# Altium PCB PCB1.PcbDoc
Units mil, origin at the board's own origin, x right, y up, seen from the top; angles counter-clockwise.
Board outline 5000 x 4000 mil, 2 copper layers (Top Layer, Bottom Layer); 30 components, 31 nets, 247 pads, 14 vias.
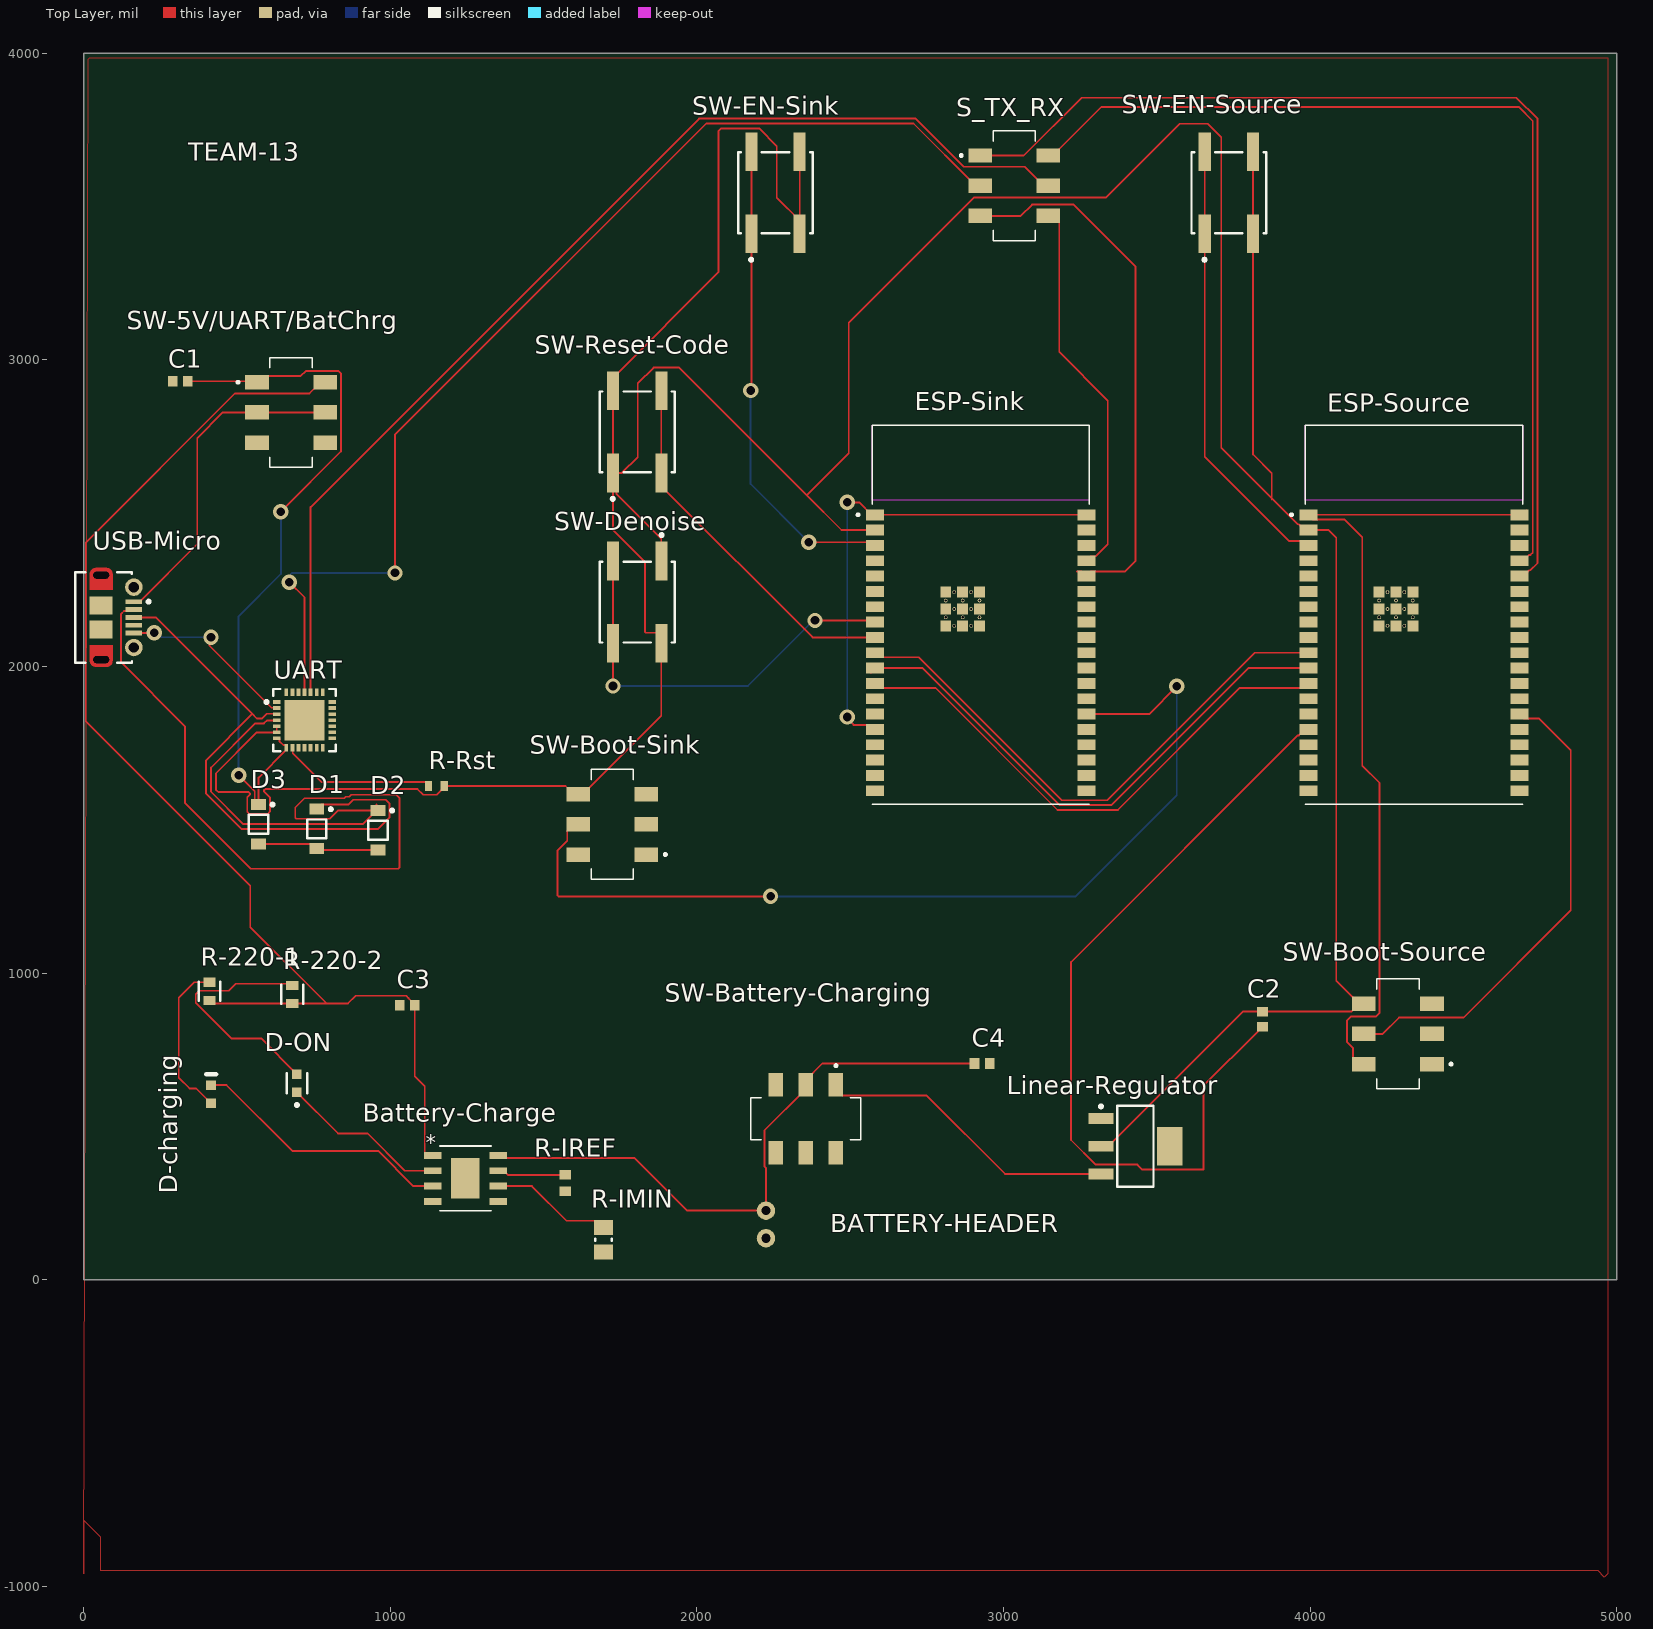
[diagram p0: Top Layer view]
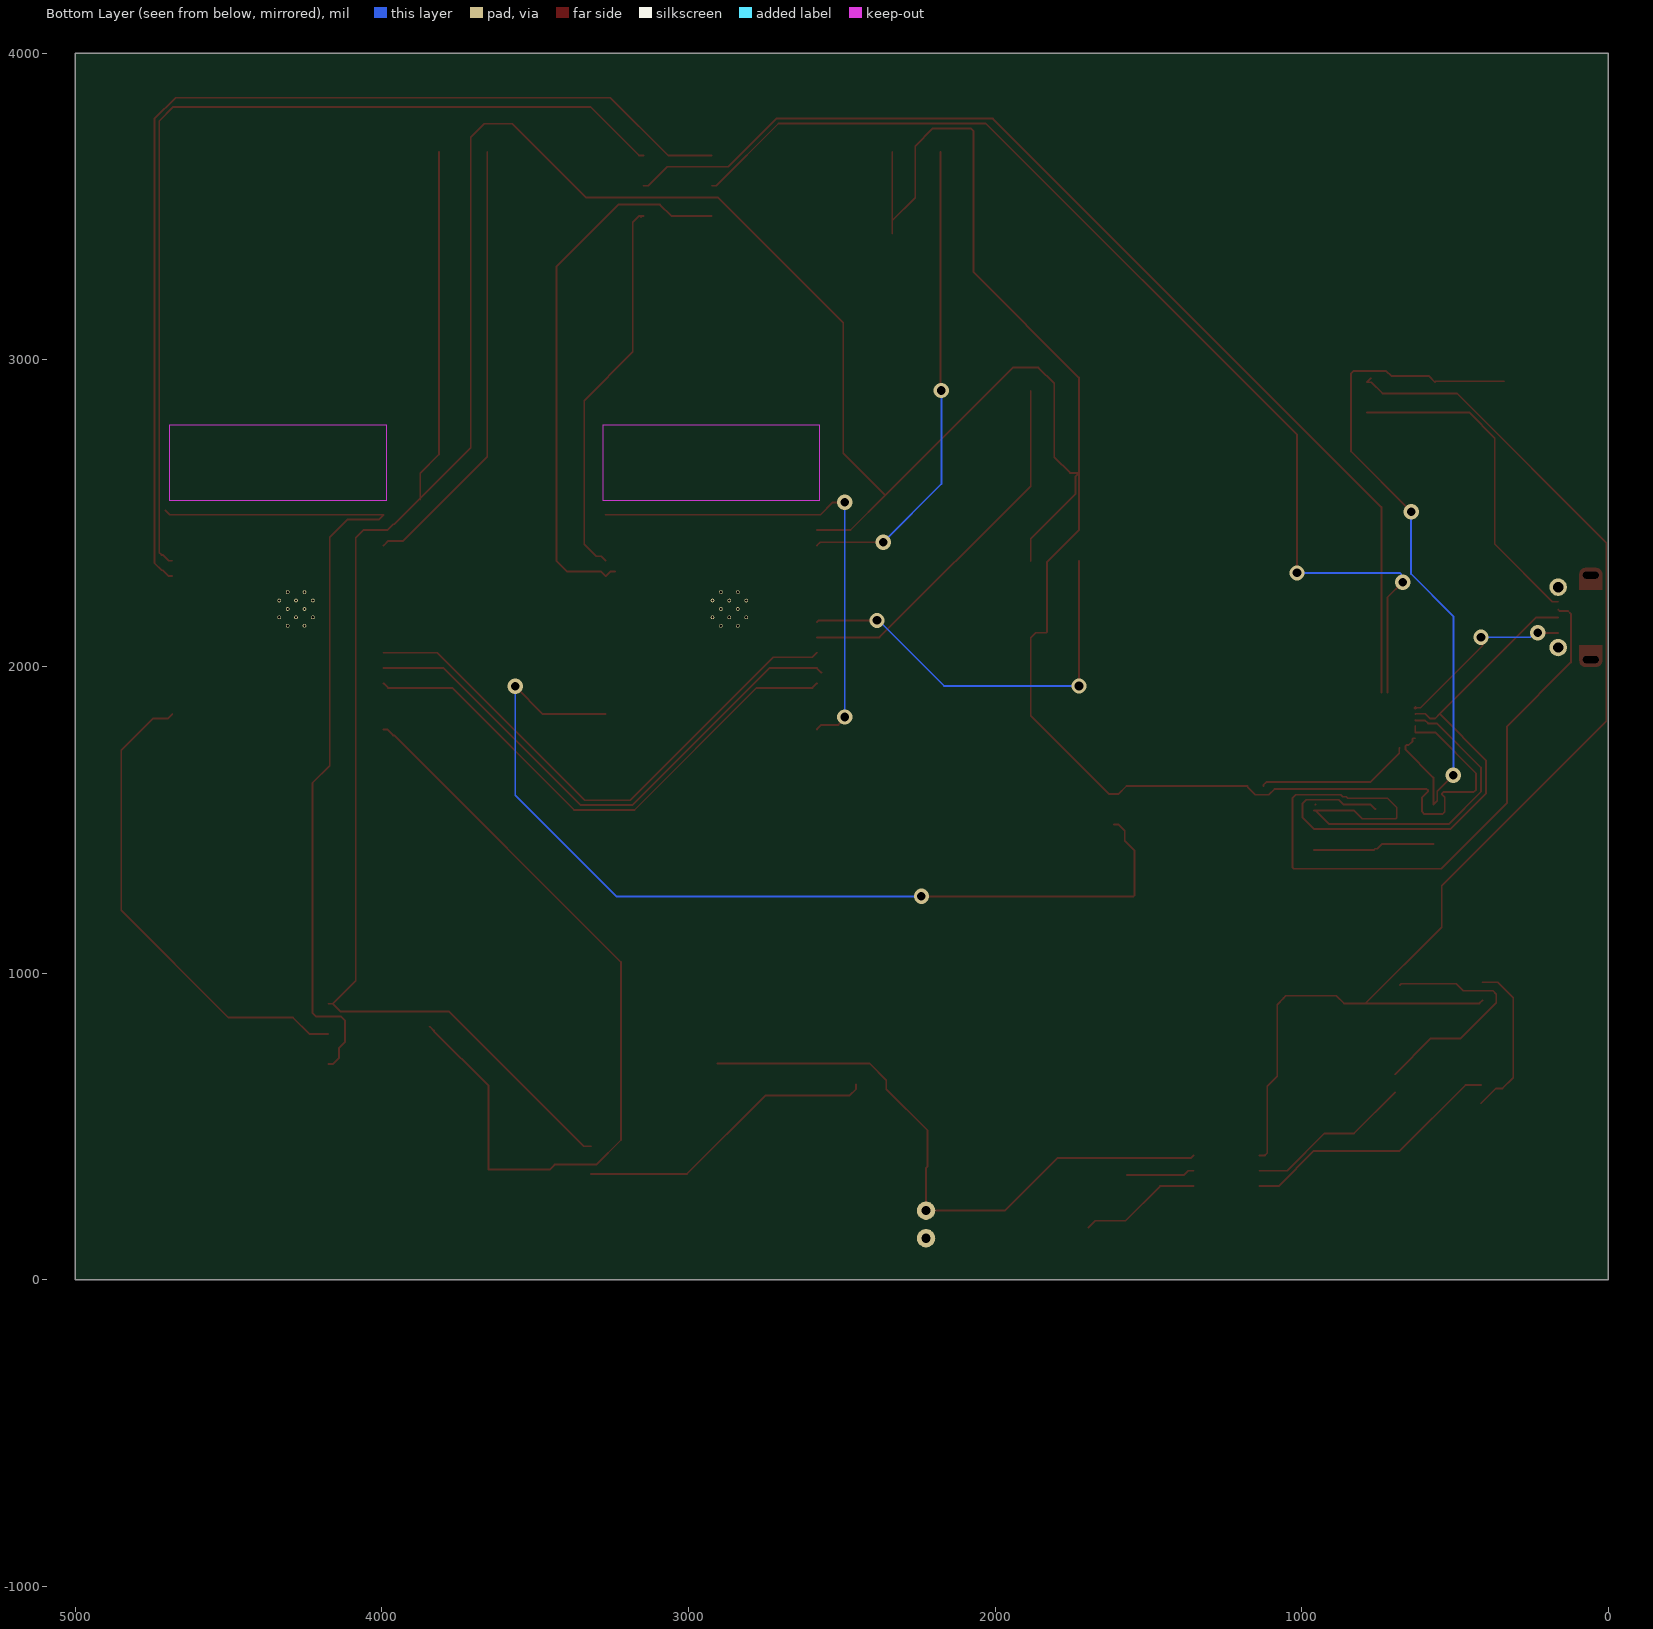
[diagram p1: Bottom Layer view, seen from below]

## Layer stack, top to bottom
Top Solder: solder mask 0.4, Solder Resist, Dk 3.5
Top Layer: signal copper 1.4
Dielectric 1: dielectric 12.6, FR-4, Dk 4.8
Bottom Layer: signal copper 1.4
Bottom Solder: solder mask 0.4, Solder Resist, Dk 3.5

## Board outline
0,0 5000,0 5000,4000 0,4000

## Design rules (kind name [scope] priority, off if disabled: settings)
Clearance [All] p1: gap=10 ignorepadtopadclearanceinfootprint=FALSE
PolygonConnect [All] p1: connectstyle=Relief reliefconductorwidth=10 reliefentries=4 polygonreliefangle="90 Angle" airgapwidth=10
RoutingVias [All] p1: holewidth=28 width=50 viastyle="Through Hole" minholewidth=28 minwidth=50 maxholewidth=28 maxwidth=50
SolderMaskExpansion [All] p1: expansion=4 istentingtop=FALSE
SupplyNets "Schematic Supply Nets" [InNet('GND')] p1: voltage=0.000
Width [All] p1: maxlimit=6 minlimit=6 preferedwidth=6
30 further rules are at their usual default settings.

## Components (designator, comment, footprint, x,y, rotation, side; value= is the part's Value field where it differs from the comment)
Battery-Charge "TPB4056A20-ES1R" ESOP-8_TPK 1245,330 r0 top
BATTERY-HEADER "PHR-2" FP-PHR-2-MFG 2290,175 r0 top
C1 "C0603C105K3RACTU" CAPC1608X87X35LL15T15 315,2930 r0 top value=1uF
C2 "C0603C105K3RACTU" CAPC1608X87X35LL15T15 3845,849.61 r90 top value=1uF
C3 "C0603C105K3RACTU" CAPC1608X87X35LL15T15 1055,895 r0 top value=1uF
C4 "C0603C105K3RACTU" CAPC1608X87X35LL15T15 2930,705 r180 top value=1uF
D1 "MMSZ4691T1G" ONSC-SOD-123-2-425-04_V 760,1470 r270 top
D2 "MMSZ4691T1G" ONSC-SOD-123-2-425-04_V 960,1465.63 r270 top
D3 "MMSZ4691T1G" ONSC-SOD-123-2-425-04_V 570,1485 r270 top
D-charging "LTST-C190AKT" LTST-C190AKT-2_V 415,605 r90 top
D-ON "LTST-C190GKT" FP-LTST-C190GKT-MFG 695,640.47 r90 top
ESP-Sink "ESP32-WROVER-E-N8R8" XCVR_ESP32-WROVER-E-N8R8 2925.51,2169.33 r0 top
ESP-Source "ESP32-WROVER-E-N8R8" XCVR_ESP32-WROVER-E-N8R8 4338.94,2169.33 r0 top
Linear-Regulator "LD1117S33TR" SOT-223_L 3430,435 r0 top
R-220-1 "CRCW0603220RFKEA" FP-CRCW0603-e3-MFG 410,940.47 r90 top
R-220-2 "CRCW0603220RFKEA" FP-CRCW0603-e3-MFG 680,930.47 r90 top
R-IMIN "CRCW0805100KJNEA" RESC2013X50X30ML20T20 1695,130 r270 top value=100kR
R-IREF "ERJ-3EKF1301V" RESC1608X55X30NL15T15 1570,315 r270 top value=1.3kR
R-Rst "RC0603FR-074K7L" RESC1608X55X25LL10T15 1150,1610 r0 top
S_TX_RX "SLW-913535-2A-SMT" SW_SLW-913535-2A-SMT 3035,3568.09 r270 top
SW-5V/UART/BatChrg "SLW-913535-2A-SMT" SW_SLW-913535-2A-SMT 676.22,2828.43 r270 top
SW-Battery-Charging "SLW-913535-2A-SMT" SW_SLW-913535-2A-SMT 2355,525 r180 top
SW-Boot-Sink "SLW-913535-2A-SMT" SW_SLW-913535-2A-SMT 1723.78,1485 r90 top
SW-Boot-Source "SLW-913535-2A-SMT" SW_SLW-913535-2A-SMT 4286.22,801.57 r90 top
SW-Denoise "EVQ-Q2F03W" FP-EVQ-Q2F03W-MFG 1805,2210 r270 top
SW-EN-Sink "EVQ-Q2F03W" FP-EVQ-Q2F03W-MFG 2256.26,3545 r90 top
SW-EN-Source "EVQ-Q2F03W" FP-EVQ-Q2F03W-MFG 3735,3545 r90 top
SW-Reset-Code "EVQ-Q2F03W" FP-EVQ-Q2F03W-MFG 1805,2765 r90 top
UART "CP2103-GMR" FP-CP2103-GMR-MFG 720,1825 r0 top
USB-Micro "105017-0001" USB-MICRO-B_V 110,2160 r270 top

## Footprints (in the part's own frame and the unit in brackets; to place one, negate y for a bottom-side part, rotate by r counter-clockwise, add the part's x,y. Pads: shape width x height; smd on the part's side, far side on the other; paste and mask are expansions set on the pad)
CAPC1608X87X35LL15T15 [mm] "Chip Capacitor, 2-Leads, Body 1.60x0.80mm, IPC High Density"
  rect 0.8x0.9 smd: 1(-0.625,0) 2(0.625,0)
  body extent -0.87,-0.48 0.87,0.48, height 0.87
ESOP-8_TPK [mil]
  rect 57.5x22 smd paste+0 mask+0: 1(-107.25,75) 2(-107.25,25) 3(-107.25,-25) 4(-107.25,-75) 5(107.25,-75) 6(107.25,-25) 7(107.25,25) 8(107.25,75)
  rect 93x132 smd paste-65.5 mask+0: 9(0,0)
  silkscreen extent -84,-106 84,106, body extent -122,-101 122,101, height 67
FP-CP2103-GMR-MFG [mm]
  rect 0.6x0.3 smd paste+0 mask+0: 1(-2.3,1.5) 2(-2.3,1) 3(-2.3,0.5) 4(-2.3,0) 5(-2.3,-0.5) 6(-2.3,-1) 7(-2.3,-1.5) 15(2.3,-1.5) 16(2.3,-1) 17(2.3,-0.5) 18(2.3,0) 19(2.3,0.5) 20(2.3,1) 21(2.3,1.5)
  rect 0.3x0.6 smd paste+0 mask+0: 8(-1.5,-2.3) 9(-1,-2.3) 10(-0.5,-2.3) 11(0,-2.3) 12(0.5,-2.3) 13(1,-2.3) 14(1.5,-2.3) 22(1.5,2.3) 23(1,2.3) 24(0.5,2.3) 25(0,2.3) 26(-0.5,2.3) 27(-1,2.3) 28(-1.5,2.3)
  rect 3.35x3.35 smd paste-1000 mask+0: 29(0,0)
  silkscreen extent -3.27,-2.58 2.58,2.58, body extent -2.7,-2.7 2.7,2.7, height 0.25
FP-CRCW0603-e3-MFG [mm]
  rect 0.75x1 smd paste+0 mask+0: 1(-0.75,0) 2(0.75,0)
  silkscreen extent -0.8,-0.9 0.8,0.9, body extent -1.22,-0.6 1.22,0.6, height 0.25
FP-EVQ-Q2F03W-MFG [mm]
  rect 3.2x1 smd paste+0 mask+0: A(-3.4,2) A'(3.4,2) B(-3.4,-2) B'(3.4,-2)
  silkscreen extent -5.67,-3.1 3.35,3.1, body extent -5.1,-3.2 5.1,3.2, height 0.25
FP-LTST-C190GKT-MFG [mm]
  rect 0.8x0.8 smd paste+0 mask+0: 1(-0.75,0) 2(0.75,0)
  silkscreen extent -1.92,-0.85 0.85,0.85, body extent -1.25,-0.55 1.25,0.55, height 0.25
FP-PHR-2-MFG [mil]
  round 60 hole 30: 1(-65,50) 2(-65,-40)
  body extent -118,-93 118,93, height 10
LTST-C190AKT-2_V [mm] "SMD, 2-Leads, Body 1.6x0.8mm"
  rect 0.8x0.8 smd: 1(-0.75,0) 2(0.75,0)
  silkscreen extent 1.65,-0.4 1.65,0.4, body extent -0.8,-0.4 0.8,0.4, height 0.8
ONSC-SOD-123-2-425-04_V [mm] "SOD, 2-Leads, Body 2.69x1.6mm"
  rect 0.91x1.22 smd: 1(-1.635,0) 2(1.635,0)
  silkscreen extent -1.76,-0.8 0.78,1.29, body extent -1.35,-0.8 1.35,0.8, height 1.35
RESC1608X55X25LL10T15 [mm] "Chip Resistor, 2-Leads, Body 1.60x0.80mm, IPC High Density"
  rect 0.6x0.8 smd: 1(-0.65,0) 2(0.65,0)
  body extent -0.85,-0.45 0.85,0.45, height 0.55
RESC1608X55X30NL15T15 [mm] "Chip Resistor, 2-Leads, Body 1.60x0.80mm, IPC Medium Density"
  rect 0.8x0.95 smd: 1(-0.675,0) 2(0.675,0)
  body extent -0.87,-0.48 0.87,0.48, height 0.55
RESC2013X50X30ML20T20 [mm] "Chip Resistor, 2-Leads, Body 2.00x1.25mm, IPC Low Density"
  rect 1.25x1.55 smd: 1(-1.025,0) 2(1.025,0)
  silkscreen extent -0.1,-0.67 0.1,0.67, body extent -1.1,-0.72 1.1,0.72, height 0.5
SOT-223_L [mm] "SOT223, 4-Leads, Body 6.5x3.5mm, Pitch 2.3mm, Lead Span 7mm, IPC High Density"
  rect 2.1x0.9 smd: 1(-2.85,2.3) 2(-2.85,0) 3(-2.85,-2.3)
  rect 2.1x3.2 smd: 4(2.85,0)
  silkscreen extent -2.97,-3.35 1.5,3.42, body extent -1.85,-3.35 1.85,3.35, height 1.8
SW_SLW-913535-2A-SMT [mm]
  rect 1.2x1.95 smd: 1(-2.5,-2.825) 2(0,-2.825) 3(2.5,-2.825) 4(-2.5,2.825) 5(0,2.825) 6(2.5,2.825)
  silkscreen extent -4.55,-4.5 4.55,1.75
USB-MICRO-B_V [mm] "USB, MICRO B, Body 7.491x4.695 mm, Pitch 0.65 mm"
  rect 0.4x1.35 smd: 1(-1.3,1.35) 2(-0.65,1.35) 3(0,1.35) 4(0.65,1.35) 5(1.3,1.35)
  round 1.45 hole 0.85: 6(-2.5,1.35) 7(2.5,1.35)
  rrect50% 0x0 hole 0.6 slot 1.3 at 90 deg: 8(-3.5,-1.35) 11(3.5,-1.35)
  rect 1.5x1.9 smd: 9(-1,-1.35) 10(1,-1.35)
  Top Layer circle w0.5: c3.6,-0.9 r0.25
  Top Layer circle w0.5: c3.6,-1.8 r0.25
  Top Layer circle w0.5: c-3.6,-0.9 r0.25
  Top Layer circle w0.5: c-3.6,-1.8 r0.25
  Top Layer region: -2.3,-2.3 -2.3,-0.4 -3.6,-0.4 -3.6,-2.3
  Top Layer region: 2.3,-0.4 2.3,-2.3 3.6,-2.3 3.6,-0.4
  Top Layer region: 3.6,-0.9 3.6,-1.8 4.1,-1.8 4.1,-0.9
  Top Layer region: -3.6,-1.8 -3.6,-0.9 -4.1,-0.9 -4.1,-1.8
  silkscreen extent -3.75,-3.5 3.75,2.7, body extent -4.1,-3.9 4.1,1.5, height 2.67
XCVR_ESP32-WROVER-E-N8R8 [mm]
  rect 1.5x0.9 smd: 1(-8.75,8.26) 2(-8.75,6.99) 3(-8.75,5.72) 4(-8.75,4.45) 5(-8.75,3.18) 6(-8.75,1.91) 7(-8.75,0.64) 8(-8.75,-0.63) 9(-8.75,-1.9) 10(-8.75,-3.17) 11(-8.75,-4.44) 12(-8.75,-5.71) 13(-8.75,-6.98) 14(-8.75,-8.25) 15(-8.75,-9.52) 16(-8.75,-10.79) 17(-8.75,-12.06) 18(-8.75,-13.33) 19(-8.75,-14.6) 20(8.75,-14.6) 21(8.75,-13.33) 22(8.75,-12.06) 23(8.75,-10.79) 24(8.75,-9.52) 25(8.75,-8.25) 26(8.75,-6.98) 27(8.75,-5.71) 28(8.75,-4.44) 29(8.75,-3.17) 30(8.75,-1.9) 31(8.75,-0.63) 32(8.75,0.64) 33(8.75,1.91) 34(8.75,3.18) 35(8.75,4.45) 36(8.75,5.72) 37(8.75,6.99) 38(8.75,8.26)
  rect 0.9x0.9 smd: 39_1(-2.9,1.86) 39_2(-1.5,1.86) 39_3(-0.1,1.86) 39_4(-2.9,0.46) 39_5(-1.5,0.46) 39_6(-0.1,0.46) 39_7(-2.9,-0.94) 39_8(-1.5,-0.94) 39_9(-0.1,-0.94)
  round 0.3 hole 0.2 mask+0: 40(-2.2,1.86) 41(-0.8,1.86) 42(-2.9,1.16) 43(-1.5,1.16) 44(-0.1,1.16) 45(-2.2,0.46) 46(-0.8,0.46) 47(-2.9,-0.24) 48(-1.5,-0.24) 49(-0.1,-0.24) 50(-2.2,-0.94) 51(-0.8,-0.94)
  Keep-Out Layer region: 9,9.48 -9,9.48 -9,15.7 9,15.7
  silkscreen extent -10.26,-15.7 9,15.7, body extent -9,-15.7 9,15.7, height 3.45

## Part data
Battery-Charge: "No Description Available", Mfr_Name=3Peak, Supplier Part Number 1=5503-TPB4056A20-ES1RCT-ND, RefDes=RefDes, Supplier 1=Digikey, Type=Type
BATTERY-HEADER: library part CMP-002-00071-2, "PH Series 2 Position 2 mm Pitch Free Hanging Housing Connector", Case/Package=None, Availability=Unavailable, Component Type=Standard, Design Item ID=PHR-2, MP=PHR-2, Pins=2, Price=None, Source=PHR-2.SchLib
C1 C2 C3 C4: library part CMP-2006-03713-1, Capacitor Type=Ceramic, Case/Package=0603, Manufacturer=Kemet, Max Operating Temperature=125°C, Min Operating Temperature=-55°C, Package Shape=Rectangular, Package Style=SMTMeter, Rated DC Voltage (URdc)=25V, Supplier Part Number=80-C0603C105K3R, Temperature Characteristics Code=X7R, Tolerance  (fill in as +-)=10%, Category="Ceramic Capacitors", ComponentLink1Description=https://datasheet.ciiva.com:443/pdfs/VipMasterIC/IC/KEME/KEME-S-A0008991654/KEME-S-A0008991654-1.pdf?src-supplier=IHS+Markit, ComponentLink1URL=https://datasheet.ciiva.com:443/pdfs/VipMasterIC/IC/KEME/KEME-S-A0008991654/KEME-S-A0008991654-1.pdf?src-supplier=IHS+Markit, ComponentLink2Description=http://www.farnell.com/datasheets/2740425.pdf?src-supplier=Farnell, ComponentLink2URL=http://www.farnell.com/datasheets/2740425.pdf?src-supplier=Farnell, ComponentLink3Description=http://uk.rs-online.com/webdocs/1528/0900766b81528de6.pdf?src-supplier=Rs, ComponentLink3URL=http://uk.rs-online.com/webdocs/1528/0900766b81528de6.pdf?src-supplier=Rs, ComponentLink4Description=http://components.arrow.com/part/dataview/53683125S181328N7429?src-supplier=Arrow+Electronics, ComponentLink4URL=http://components.arrow.com/part/dataview/53683125S181328N7429?src-supplier=Arrow+Electronics, ComponentLink5Description=http://www.farnell.com/datasheets/2740425.pdf?src-supplier=Element14, ComponentLink5URL=http://www.farnell.com/datasheets/2740425.pdf?src-supplier=Element14, ComponentLink6Description=http://www.kemet.com/Lists/ProductCatalog/Attachments/53/KEM_C1002_X7R_SMD.pdf?src-supplier=Avnet, ComponentLink6URL=http://www.kemet.com/Lists/ProductCatalog/Attachments/53/KEM_C1002_X7R_SMD.pdf?src-supplier=Avnet, ComponentLink7Description=http://www.farnell.com/datasheets/2740425.pdf?src-supplier=Newark, ComponentLink7URL=http://www.farnell.com/datasheets/2740425.pdf?src-supplier=Newark, ComponentLink8Description=https://api.kemet.com/component-edge/download/datasheet/C0603C105K3RACTU.pdf?src-supplier=Digikey, ComponentLink8URL=https://api.kemet.com/component-edge/download/datasheet/C0603C105K3RACTU.pdf?src-supplier=Digikey, ComponentLink9Description=https://datasheet.octopart.com/C0603C105K3RACTU-KEMET-datasheet-164512540.pdf?src-supplier=TME, ComponentLink9URL=https://datasheet.octopart.com/C0603C105K3RACTU-KEMET-datasheet-164512540.pdf?src-supplier=TME, Dielectric Material=Ceramic, Height=0.8mm, JESD-609 Code=e3, Length=1.6mm, Manufacturer Part Number=C0603C105K3RACTU, Mounting Technology="Surface Mount", Multilayer=Yes, Packaging="Tape and Reel", Part Number=C0603C105K3RACTU, Pins=2, Pricing="1=0.25, 10=0.156, 50=0.156, 100=0.119, 500=0.112, 1000=0.107, 4000=0.06, 8000=0.058, 10000=0.058 (USD)", Reach SVHC Compliant=Yes, RoHS=Yes, RoHS Compliant=Yes, Stock=8675, Supplier=Mouser, Terminal Finish=Nickel, Termination=Wraparound, Tolerance (fill in as +-)=10%, Width=0.8mm
D1 D2 D3: library part CMP-1060-00606-1, "Zener Voltage Regulator, 500 mW, 2-Pin SOD-123, Pb-Free, Tape and Reel", Manufacturer="On Semiconductor", ComponentLink1Description="Manufacturer URL", ComponentLink1URL=http://www.onsemi.com/, ComponentLink2Description=Datasheet, ComponentLink2URL=http://www.onsemi.com/pub_link/Collateral/MMSZ4678T1-D.PDF, ComponentLink3Description="Package Specification", ComponentLink3URL=http://www.onsemi.com/pub_link/Collateral/425-04.PDF, DatasheetVersion="Rev. 9", Mounting Technology="Surface Mount", P Max (W)=0.5, PackageDescription="2-Pin SOD, Body 1.6 x 2.69 mm", PackageReference=SOD-123-2-425-04, PackageVersion="Rev. G, 10/2009", Packing="Tape and Reel", PartNumber=MMSZ4691T1G, RoHS=Pb-Free, VZ Typ (V)=6.2
D-charging: library part CMP-1674-00006-1, "Single Color Chip LED, 2.1 V, 2 mcd, -55 to 85 degC, 2-Pin SMD, RoHS, Tape and Reel", ComponentLink1Description="Manufacturer URL", ComponentLink1URL=http://www.us.liteon.com/, ComponentLink2Description=Datasheet, ComponentLink2URL=http://datasheet.octopart.com/LTST-C190AKT-Lite-On-datasheet-11729267.pdf, DatasheetVersion=Jan-03, PackageDescription="2-Pin Surface Mount Device, Body 1.6 x 0.8 mm", PackageReference=LTST-C190AKT-2
D-ON: library part CMP-22017-000005-2, "LED GREEN CLEAR CHIP SMD", Case Code (Imperial)=0603, Case Code (Metric)=1608, Color=Green, Forward Current=30mA, Forward Voltage=2.1V, Lens Color=Colorless, Max Operating Temperature=85°C, Min Operating Temperature=-55°C, Package Quantity=1, Power Dissipation=100mW, Reverse Voltage=5V, Test Current=10mA, Voltage=2V, Case/Package=0603, Depth=0.8mm, Dominant Wavelength=569nm, Height=0.8mm, Illumination Color=Green, Lead Free="Lead Free", Length=1.6mm, Lens Style=Clear, Lens Transparency=Clear, Luminous Intensity=6mcd, Mount="Surface Mount", Number of Elements=1, Number of LEDs=1, Number of Pins=2, Packaging="Tape and Reel", Power Rating=100mW, Radiation Hardening=No, Viewing Angle=130°, Wavelength=565nm, Width=0.8mm
ESP-Sink ESP-Source: library part CMP-005-000000-2, "Multiprotocol Modules SMD Module ESP32-WROVER-E, ESP32-D0WD-V3, 3.3V 64Mbit PSRAM, 8 MB SPI flash, PCB Antenna", Package=None, Availability=Unavailable, Component Type=Standard, Design Item ID=ESP32-WROVER-E-N8R8, MP=ESP32-WROVER-E-N8R8, Pin Count=47, Price=None, Source=ESP32-WROVER-E-N8R8.SchLib
Linear-Regulator: library part CMP-0244-00310-1, "Fixed Low Drop Positive Voltage Regulator, 3.3V, 4-Pin SOT-223, Tape and Reel", ComponentLink1Description="Manufacturer URL", ComponentLink1URL=http://www.st.com, ComponentLink2Description=Datasheet, ComponentLink2URL=http://www.st.com/internet/com/TECHNICAL_RESOURCES/TECHNICAL_LITERATURE/DATASHEET/CD00000544.pdf, DatasheetVersion=1/11/2011, PackageDescription="4-Pin SOT-223 Package, 6.5 x 3.5 mm Body, 2.3 mm Pitch, 7 mm Lead Span", PackageReference=SOT-223, PackageVersion=2010
R-220-1 R-220-2: library part CMP-2000-03085-2, "RES Thick Film, 220Ω, 1%, 0.1W, 100ppm/°C, 0603", Case Code (Imperial)=0603, Case Code (Metric)=1608, Max Operating Temperature=155°C, Max Power Dissipation=100mW, Min Operating Temperature=-55°C, Package Quantity=10, Resistance=220R, Temperature Coefficient=100ppm/°C, Tolerance=1%, Voltage Rating=75V, Case/Package=0603, Composition="Thick Film", Contact Plating=Tin, Depth=0.85mm, Features="Automotive AEC-Q200", Height=0.45mm, Lead Free="Lead Free", Length=1.55mm, Military Standard=Not, Number of Terminations=2, Packaging="Tape and Reel", Power Rating=100mW, Radiation Hardening=No, Termination=SMD/SMT, Voltage Rating (DC)=75V, Weight=7.1E-05oz, Width=0.033inch
R-IMIN: library part CMP-2001-04900-1, Case/Package=0805, Manufacturer="Vishay Dale", Max Operating Temperature=155°C, Min Operating Temperature=-55°C, Package Height=0.45mm, Package Length=2mm, Package Shape=Rectangular, Package Width=1.25mm, Power=125mW, Rated Temperature=70°C, Resistor Type="FIXED RESISTOR", Supplier Part Number=71-CRCW0805J-100K-E3, Temperature Coefficient (ppm/Cel)=200, Tolerance=5%, Working Voltage=150V, Category="Chip SMD Resistors", ComponentLink1Description=https://datasheet.ciiva.com:443/pdfs/VipMasterIC/IC/VISH/VISH-S-A0007266705/VISH-S-A0007266705-1.pdf?src-supplier=IHS+Markit, ComponentLink1URL=https://datasheet.ciiva.com:443/pdfs/VipMasterIC/IC/VISH/VISH-S-A0007266705/VISH-S-A0007266705-1.pdf?src-supplier=IHS+Markit, Construction=Chip, JESD-609 Code=e3, Manufacturer Part Number=CRCW0805100KJNEA, Mounting Technology="Surface Mount", Packaging="Tape and Reel", Part Number=CRCW0805100KJNEA, Pins=2, Pricing="1=0.1, 10=0.022, 50=0.022, 100=0.018, 1000=0.011, 10000=0.004 (USD)", Reach SVHC Compliant=Yes, Reference Standard=AEC-Q200, RoHS=Yes, RoHS Compliant=Yes, Stock=127338, Supplier=Mouser, Technology="METAL GLAZE/THICK FILM", Terminal Finish=Nickel, Termination=Wraparound
R-IREF: library part CMP-2000-00232-1, Case/Package=0603, Manufacturer=Panasonic, Max Operating Temperature=155°C, Min Operating Temperature=-55°C, Package Height=0.45mm, Package Length=1.6mm, Package Shape=Rectangular, Package Width=0.8mm, Power=100mW, Rated Temperature=70°C, Resistor Type="FIXED RESISTOR", Supplier Part Number=667-ERJ-3EKF1301V, Temperature Coefficient (ppm/Cel)=100, Tolerance=1%, Working Voltage=75V, Category="Chip SMD Resistors", ComponentLink1Description=https://datasheet.ciiva.com:443/pdfs/VipMasterIC/IC/PANA/PANA-S-A0009889626/PANA-S-A0009889626-1.pdf?src-supplier=IHS+Markit, ComponentLink1URL=https://datasheet.ciiva.com:443/pdfs/VipMasterIC/IC/PANA/PANA-S-A0009889626/PANA-S-A0009889626-1.pdf?src-supplier=IHS+Markit, ComponentLink2Description=https://datasheet.ciiva.com/46374/426256-46374156.pdf?src-supplier=Element14, ComponentLink2URL=https://datasheet.ciiva.com/46374/426256-46374156.pdf?src-supplier=Element14, ComponentLink3Description=https://datasheet.ciiva.com/46387/426256-46387020.pdf?src-supplier=Element14, ComponentLink3URL=https://datasheet.ciiva.com/46387/426256-46387020.pdf?src-supplier=Element14, ComponentLink4Description=https://datasheet.ciiva.com/6137/426256-6137483.pdf?src-supplier=Farnell, ComponentLink4URL=https://datasheet.ciiva.com/6137/426256-6137483.pdf?src-supplier=Farnell, ComponentLink5Description=https://datasheet.ciiva.com/28593/1678782-28593215.pdf?src-supplier=Element14, ComponentLink5URL=https://datasheet.ciiva.com/28593/1678782-28593215.pdf?src-supplier=Element14, ComponentLink6Description=https://datasheet.ciiva.com/43460/426256-43460476.pdf?src-supplier=Farnell, ComponentLink6URL=https://datasheet.ciiva.com/43460/426256-43460476.pdf?src-supplier=Farnell, ComponentLink7Description=https://datasheet.ciiva.com/24165/aoa0000ce2-24165718.pdf?src-supplier=Mouser, ComponentLink7URL=https://datasheet.ciiva.com/24165/aoa0000ce2-24165718.pdf?src-supplier=Mouser, ComponentLink8Description=https://datasheet.ciiva.com/16788/70260748-16788053.pdf?src-supplier=Allied+Electronics, ComponentLink8URL=https://datasheet.ciiva.com/16788/70260748-16788053.pdf?src-supplier=Allied+Electronics, ComponentLink9Description=https://datasheet.ciiva.com/30261/aoa0000ce2-30261979.pdf?src-supplier=Onlinecomponents.com, ComponentLink9URL=https://datasheet.ciiva.com/30261/aoa0000ce2-30261979.pdf?src-supplier=Onlinecomponents.com, Construction=Rectangular, JESD-609 Code=e3, Manufacturer Part Number=ERJ-3EKF1301V, Mounting Technology="Surface Mount", Packaging="Tape and Reel", Part Number=ERJ-3EKF1301V, Pins=2, Pricing="1=0.1, 10=0.03, 50=0.03, 100=0.017, 500=0.014, 1000=0.009, 5000=0.007, 10000=0.006, 25000=0.005 (USD)", Reach SVHC Compliant=Yes, Reference Standard=AEC-Q200, RoHS=Yes, RoHS Compliant=Yes, Stock=69323, Supplier=Mouser, Technology="METAL GLAZE/THICK FILM", Terminal Finish=Nickel, Termination=Wraparound
R-Rst: library part CMP-2000-06942-1, "Chip Resistor, 4.7 KOhm, +/- 1%, 0.1 W, -55 to 155 degC, 0603 (1608 Metric), RoHS, Tape and Reel", Case Code - in=0603, Case Code - mm=1608, Manufacturer=Yageo, Operating Temperature Range=-55Cto+155C, Package Description="2-Pin Surface Mount Device, Body 1.6 x 0.8 mm", Power Rating=100mW, Resistance=4.7kOhms, Temperature Coefficient=100PPM/C, Tolerance=1%, Voltage Rating=50V, Datasheet URL=http://www.yageo.com/documents/recent/PYu-RC_Group_51_RoHS_L_7.pdf, Datasheet Version="Rev. 7, 05/2017", Manufacturer URL=http://www.yageo.com/, Mounting Technology=SurfaceMount, Package Reference=0603, Packaging=Reel, Product=ThickFilmResistorsGeneralPurpose, Series=RC, Termination Style=SMD/SMT
S_TX_RX SW-5V/UART/BatChrg SW-Battery-Charging SW-Boot-Sink SW-Boot-Source: library part CMP-007-000000-2, "Switch Slide ON ON DPDT Raised Slide 0.1A 12VDC 10000Cycles Gull Wing SMD Box", Package=None, Availability=Unavailable, Component Type=Standard, Design Item ID=SLW-913535-2A-SMT, MP=SLW-913535-2A-SMT, Pin Count=6, Price=None, Source=SLW-913535-2A-SMT.SchLib
SW-Denoise SW-EN-Sink SW-EN-Source SW-Reset-Code: library part CMP-05618-000127-1, "SWITCH TACTILE SPST-NO 0.02A 15V", Actuator Color=White, Case/Package=SMD/SMT, Contact Current Rating=20mA, Contact Resistance=100mR, Max Operating Temperature=85°C, Max Voltage Rating (AC)=250V, Max Voltage Rating (DC)=15V, Min Operating Temperature=-40°C, Operating Force=1N, Package Quantity=1, Actuator Length=1.3mm, Actuator Type=Standard, Body Depth=6mm, Color=White, Contact Plating=Gold, Current Rating=20mA, Depth=6.6mm, Electrical Life=1000000Cycles, Height=3.1mm, Illumination Type=Non-Illuminated, Lead Free="Lead Free", Length=6mm, Max Current Rating=20mA, Mechanical Life=1000000Cycles, Mount="Surface Mount", Number of Poles=1, Orientation=Straight, Packaging="Tape and Reel", Radiation Hardening=No, RoHS Compliant=Yes, Series=EVQQ2, Size=1.8mm, Switch Function=Off-Mom, Switch Travel=0.2mm, Termination=SMD/SMT, Thickness=1.8mm, Throw Configuration=SPST, Voltage Rating (AC)=250V, Voltage Rating (DC)=15V, Width=6.5mm
UART: library part CMP-08107-000005-1, "IC CTRLR BRIDGE USB-UART 28MLP", Ambient Temperature Range High=+125°C, Ambient Temperature Range Low=-55°C, Manufacturer="Silicon Labs", Max Supply Voltage=3.6V, Min Supply Voltage=1.8V, Nominal Supply Current=20mA, Package=0, Temperature="-40°C to +85°C", Temperature Range High=+85°C, Temperature Range Low=-40°C, Automotive=No, Category=IC, ComponentLink2Description=Datasheet, ComponentLink2URL=https://www.silabs.com/documents/public/data-sheets/CP2103.pdf, Device Class L1="Integrated Circuits (ICs)", Device Class L2="Interface ICs", Device Class L3=Controllers, Digikey Description="IC CTRLR BRIDGE USB-UART 28MLP", Function="Bridge, USB to UART", Height=1mm, Interface=UART,USB,RS-232,RS-485, Ipc Land Pattern Name=QFN50P500X500X90-28, Lead Free=Yes, Manufacturer Part Number=CP2103-GMR, Mouser Description="I/O Controller Interface IC USB-TO-UART BRIDGE", Octopart=https://octopart.com/cp2103-gmr-silicon+labs-519938, RoHS=TRUE, Standoff Height=0.03mm
USB-Micro: library part CMP-2000-05827-1, "Micro-USB B Receptacle, Right Angle, Bottom Mount, Surface Mount, with Solder Tabs, -30 to 85 degC, 5-Pin USB, RoHS, Tape and Reel", Manufacturer=Molex, Package Description="5-Leads USB, Micro B, Body 7.5 x 5 mm, Pitch 0.65 mm", Package Reference=MICRO-B, Package Version="Rev. F, 12/2012", Standard Package=1, Voltage - Max=30V, 3D Model=105017-0001.stp, Catalog Drawings=1050170001, Category=Connectors,Interconnects, Circuits=5, Connector Type=USB-microB, Datasheet URL=http://www.molex.com/elqNow/elqRedir.htm?ref=http://www.molex.com/webdocs/datasheets/pdf/en-us/1050170001_IO_CONNECTORS.pdf, Datasheet Version=03/2016, Family=USB,DVI,HDMIConnectors, Featured Product=Micro-USBConnectorsUSBConnectors, Features=Shielded,SolderRetention, Gender=Receptacle, Ingress Protection=-, Manufacturer URL=http://www.molex.com/, Mating Products=WM17145-ND-CABLEMICROUSBBTOSTDA1.0MWM17147-ND-CABLEMICROUSBBTOSTDA2.0MWM17146-ND-CABLEMICROUSBBTOSTDA1.5M, Mounting Technology=SurfaceMount, Mounting Type=BoardCutout,SurfaceMount,RightAngle, Number of Contacts=5, Online Catalog=Molex-MicroUSB, Other Names=WM1399DKR, Package URL=http://www.molex.com/pdm_docs/sd/1050170001_sd.pdf, Packaging=Digi-Reel®, PCN Assembly/Origin=ResinSupplier21/Oct/2015, RoHS Information=1050170001CertofCompliance, Series=-, Specifications=-

## Via types
v1: diameter 50, hole 28, Top Layer to Bottom Layer, 14 vias

## Nets (pads, with @x,y where several pads share a name; then routed paths per layer and width w, separated by ;. In a path a pad name is that pad's centre, name@x,y a point inside that pad or via, vN(x,y) a via of type N, cw(c..) or ccw(c..) an arc to the next point about the centre after c; other vN are vias at no path point)
GND: Battery-Charge.4 Battery-Charge.5 Battery-Charge.9 BATTERY-HEADER.2 C1.1 C2.1 C3.1 C4.1 D1.2 D2.2 D3.2 ESP-Sink.1 ESP-Sink.15 ESP-Sink.38 ESP-Source.1 ESP-Source.15 ESP-Source.38 Linear-Regulator.1 R-IMIN.2 R-IREF.2 SW-Boot-Sink.4 SW-Boot-Source.4 UART.2 USB-Micro.5 | length 8052.6
  Top Layer w6: USB-Micro.5@181.85,2108.82 USB-Micro.5 163.74,2109.41 229.41,2109.41 v1(230,2110) ; v1@410,2085 410,2067.4 612.25,1865.15 628.67,1865.15 UART.2 ; D3.2 738.9,1420.63 753.9,1405.63 D1.2 764.37,1401.26 D2.2 ; v1(2490,2535) 2528.74,2535 2569.21,2494.53 ESP-Sink.1 ESP-Sink.38 ; v1@2495,1825 2510.76,1809.24 2566.31,1809.24 ESP-Sink.15 ; C2.1 3843.03,825 3830.28,812.25 3830.28,810.28 3652.04,632.04 3652.04,359.01 3452.64,359.01 3436.48,375.17 3300.19,375.17 3220,455.36 3220,1035.71 3959.54,1775.24 3963.35,1775.24 3982.64,1794.53 ESP-Source.15 ; SW-Boot-Source.4 4160.24,703.15 4139.61,723.77 4139.61,756.57 4120,776.18 4120,845 4133,858 4213.39,858 4226.39,870.99 4226.39,1619.8 4170,1676.19 4170,2421.49 4111.67,2479.81 4009.17,2479.81 ESP-Source.1 ESP-Source.38 4691.55,2494.53 ESP-Source.38@4706.27,2509.24
  Top Layer w10: UART.2@628.23,1865.59 UART.2
  Bottom Layer w6: v1@245,2105 255,2095 v1(415,2095) ; v1(2490,1835) v1(2490,2535)
NetBattery-Charge_1: Battery-Charge.1 C3.2 R-220-1.1 R-220-2.1 SW-5V/UART/BatChrg.4 | length 4066.6
  Top Layer w6: R-220-1.1 420,900.94 R-220-2.1 790,900.94 ; SW-5V/UART/BatChrg.4@774.29,2940 SW-5V/UART/BatChrg.4 772.68,2926.85 736.06,2890.23 492.6,2890.23 6.45,2404.08 6.45,1820.92 542.83,1284.54 542.83,1150 790,902.83 790,900.94 ; Battery-Charge.1 1120,405 1112,413 1112,630.44 1079.61,662.84 C3.2 1079.61,896.97 1059.14,917.43 1059.14,918.1 1051.53,925.72 886.49,925.72 861.72,900.94 790,900.94
NetBattery-Charge_2: Battery-Charge.2 D-ON.1 | length 548.8
  Top Layer w6: D-ON.1 829.35,476.6 926.03,476.6 1047.63,355 Battery-Charge.2
NetBattery-Charge_3: Battery-Charge.3 D-charging.2 | length 859.2
  Top Layer w6: D-charging.2 465.47,634.53 680,420 960,420 1075,305 Battery-Charge.3
NetBattery-Charge_6: Battery-Charge.6 R-IMIN.1 | length 416.3
  Top Layer w6: Battery-Charge.6@1370,305 Battery-Charge.6 1461.5,305 1574.54,191.96 1673.39,191.96 R-IMIN.1
NetBattery-Charge_7: Battery-Charge.7 R-IREF.1 | length 223.3
  Top Layer w6: Battery-Charge.7 1370,355 1383.43,341.57 R-IREF.1
NetBattery-Charge_8: Battery-Charge.8 BATTERY-HEADER.1 C4.2 SW-Battery-Charging.2 | length 2004.1
  Top Layer w6: Battery-Charge.8 1360.25,397 1795.69,397 1967.69,225 BATTERY-HEADER.1 2225,364.96 2219.95,370.01 2219.95,486.41 2355,621.46 SW-Battery-Charging.2 2355,650.98 2409.02,705 C4.2
NetC1_2: C1.2 D3.1 SW-5V/UART/BatChrg.1 UART.7 UART.8 | length 2365.7
  Top Layer w6: C1.2 561.85,2930 SW-5V/UART/BatChrg.1 585.62,2947.47 707.8,2947.47 723.8,2963.47 831.21,2963.47 838.83,2955.86 838.83,2700.99 v1(642.83,2505) ; v1(505,1645) 505.94,1645 557.83,1593.11 557.83,1561.54 D3.1 570,1637.6 660.94,1728.54 UART.8 660.94,1740.35 658.04,1743.26 651.47,1743.26 638.26,1756.47 638.26,1763.04 635.35,1765.94 UART.7
  Bottom Layer w6: v1(505,1645) 505,2163.74 642.83,2301.57 v1(642.83,2505)
NetC2_2: C2.2 ESP-Sink.2 ESP-Source.2 Linear-Regulator.2 R-Rst.2 SW-Boot-Sink.6 SW-Boot-Source.6 SW-Denoise.A SW-Denoise.A' SW-EN-Sink.B SW-EN-Sink.B' SW-EN-Source.B SW-EN-Source.B' SW-Reset-Code.A SW-Reset-Code.A' UART.5 UART.6 | length 14106.7
  Top Layer w6: UART.5 UART.6 628.67,1784.85 564.85,1784.85 430.89,1650.89 430.89,1598.51 439.4,1590 538.32,1590 541.83,1586.49 541.83,1581.51 532.98,1572.67 532.98,1526.07 540.6,1518.46 599.4,1518.46 607.02,1526.07 607.02,1572.67 588.17,1591.51 588.17,1596.49 591.68,1600 1088.47,1600 1107.21,1581.25 1150.78,1581.25 1175.59,1606.06 R-Rst.2 1571.22,1610 1597.8,1583.43 SW-Boot-Sink.6 1627.32,1583.43 1883.74,1839.84 SW-Denoise.A' 1883.74,2093.31 1867.06,2110 1833.51,2110 1830,2113.51 1830,2341.18 1726.26,2444.92 SW-Reset-Code.A ; SW-Denoise.A 1883.74,2416.26 1737.34,2562.66 1737.34,2620.07 SW-Reset-Code.A ; SW-EN-Sink.B SW-EN-Sink.B@2335,3454.45 ; SW-EN-Sink.B' SW-EN-Sink.B@2335,3454.45 ; Linear-Regulator.2 3341.42,435 3780.63,874.21 C2.2 4134.45,874.21 SW-Boot-Source.6@4160.24,900 ; SW-EN-Source.B' SW-EN-Source.B 3813.74,2691.26 3875,2630 3875,2548.35 ; 3875,2545 3875,2548.35 ; SW-Boot-Source.6 SW-Boot-Source.6@4160.24,900 ; SW-Reset-Code.A 1754.94,2631.14 1806.81,2683 1806.81,2922.99 1858.67,2974.85 1941.66,2974.85 2358.25,2558.25 ; SW-Reset-Code.A SW-Reset-Code.A' 1726.26,2942.17 2070,3285.91 2070,3745 2079.85,3754.85 2202.59,3754.85 2260.45,3696.99 2260.45,3529 SW-EN-Sink.B@2335,3454.45 ; 2358.25,2558.25 2495,2695 2495,3121.28 2903.72,3530 3335,3530 3575,3770 3666.18,3770 3710,3726.18 3710,2713.35 3875,2548.35 ; 2358.25,2558.25 2471.51,2445 ESP-Sink.2@2568.74,2445 ; ESP-Sink.2@2568.74,2445 2569.21,2444.53 ESP-Sink.2 2580.55,2445 ESP-Sink.2@2568.74,2445 ; 3875,2548.35 3959.54,2463.81 3963.35,2463.81 3982.64,2444.53 4060.47,2444.53 4085,2420 4085,975.24 SW-Boot-Source.6@4160.24,900
NetD1_1: D1.1 UART.3 USB-Micro.3 | length 1895.5
  Top Layer w6: USB-Micro.3 235,2160 550,1845 ; UART.3 628.67,1845.46 596.36,1845.46 580.89,1830 565,1830 550,1845 ; D1.1@759.37,1535 D1.1 774.91,1549.28 863.28,1549.28 879.36,1565.37 984.94,1565.37 997.02,1553.3 997.02,1506.7 960.31,1470 514.15,1470 398.89,1585.26 398.89,1693.89 550,1845
NetD2_1: D2.1 UART.4 USB-Micro.2 | length 3402.3
  Top Layer w6: USB-Micro.2 158.43,2180.87 131.19,2180.87 121.61,2171.29 121.61,2013.39 330,1805 330,1555 545,1340 1025,1340 1030,1345 1030,1570 1018.63,1581.37 872.74,1581.37 866.37,1575 855,1575 850,1570 720,1570 690,1540 690,1506.97 693.51,1503.46 801.99,1503.46 828.54,1530 D2.1@953.9,1530 ; UART.4 628.67,1824.22 597.74,1824.22 587.52,1814 559,1814 414.89,1669.89 414.89,1591.89 520.78,1486 909.9,1486 D2.1@953.9,1530 ; 954.37,1548.74 955,1549.37 ; D2.1 D2.1@953.9,1530
NetD-charging_1: D-charging.1 R-220-1.2 | length 521.6
  Top Layer w6: R-220-1.2 360,970 310,920 310,658.51 345.15,623.37 367.1,623.37 D-charging.1
NetD-ON_2: D-ON.2 R-220-2.2 | length 785.9
  Top Layer w6: R-220-2.2 675,965 495,965 472.24,942.24 375.75,942.24 365,931.49 365,903.11 481.34,786.77 578.23,786.77 D-ON.2
NetESP-Sink_3: ESP-Sink.3 SW-EN-Sink.A SW-EN-Sink.A' | length 1565.4
  Top Layer w6: v1@2177.52,2907.52 SW-EN-Sink.A SW-EN-Sink.A' ; v1(2365,2405) 2570.55,2405 ESP-Sink.3
  Bottom Layer w6: v1(2175,2900) 2175,2595 v1(2365,2405)
NetESP-Sink_8: ESP-Sink.8 SW-Denoise.B SW-Denoise.B' | length 1341.1
  Top Layer w6: v1(1726.26,1936.26) SW-Denoise.B' SW-Denoise.B ; v1(2385,2150) 2575.55,2150 ESP-Sink.8
  Bottom Layer w6: v1(1726.26,1936.26) 2166.26,1936.26 v1@2375,2145
NetESP-Sink_9: ESP-Sink.9 SW-Reset-Code.B SW-Reset-Code.B' | length 1212.6
  Top Layer w6: SW-Reset-Code.B' SW-Reset-Code.B 1883.74,2587.83 2377.05,2094.53 ESP-Sink.9
NetESP-Sink_10: ESP-Sink.10 ESP-Source.10 | length 1811.7
  Top Layer w6: ESP-Sink.10 2595.74,2029.81 2723.23,2029.81 3189.23,1563.81 3338.22,1563.81 3818.93,2044.53 ESP-Source.10
NetESP-Sink_11: ESP-Sink.11 ESP-Source.11 | length 1804.3
  Top Layer w6: ESP-Sink.11@2566.31,1979.81 ESP-Sink.11 2735.89,1994.53 3182.6,1547.81 3351.9,1547.81 3798.62,1994.53 ESP-Source.11
NetESP-Sink_12: ESP-Sink.12 ESP-Source.12 | length 1755.3
  Top Layer w6: ESP-Sink.12 2595.74,1929.81 2777.98,1929.81 3175.98,1531.81 3372.95,1531.81 3770.95,1929.81 3979.73,1929.81 ESP-Source.12
NetESP-Sink_25: ESP-Sink.25 SW-Boot-Sink.5 | length 3113.7
  Top Layer w6: SW-Boot-Sink.5 1597.8,1485 1577.17,1464.38 1577.17,1431.58 1545,1399.41 1545,1253.51 1548.51,1250 v1(2240,1250) ; ESP-Sink.25 3474.53,1844.53 v1(3565,1935)
  Bottom Layer w6: v1(2240,1250) 3235,1250 3565,1580 v1(3565,1935)
NetESP-Sink_34: ESP-Sink.34 S_TX_RX.3 | length 1797.7
  Top Layer w6: S_TX_RX.3@2938.54,3469.67 S_TX_RX.3 3056.27,3469.67 3092.89,3506.29 3228.71,3506.29 3430,3305 3430,2343.51 3395.73,2309.24 3284.72,2309.24 ESP-Sink.34 3255.28,2309.24 3239.65,2309.24
NetESP-Sink_35: ESP-Sink.35 S_TX_RX.6 | length 1262.9
  Top Layer w6: S_TX_RX.6@3155,3465 3150.33,3469.67 S_TX_RX.6 3160.98,3469.67 3181.61,3449.04 3181.61,3025.7 3340,2867.3 3340,2398.9 3300.35,2359.24 3284.72,2359.24 ESP-Sink.35
NetESP-Source_3: ESP-Source.3 SW-EN-Source.A SW-EN-Source.A' | length 1453.1
  Top Layer w6: SW-EN-Source.A' SW-EN-Source.A 3656.26,2683.74 3930.76,2409.24 3979.73,2409.24 ESP-Source.3
NetESP-Source_25: ESP-Source.25 SW-Boot-Source.5 | length 1594.1
  Top Layer w6: SW-Boot-Source.5@4189.76,801.57 SW-Boot-Source.5 4236.59,801.57 4290.01,854.99 4500.39,854.99 4850,1204.61 4850,1726.49 4746.67,1829.81 4698.14,1829.81 ESP-Source.25
NetESP-Source_34: ESP-Source.34 S_TX_RX.1 | length 3449.5
  Top Layer w6: S_TX_RX.1 3065.83,3666.52 3254.31,3855 4672.63,3855 4741.95,3785.67 4741.95,2337.43 4718.34,2313.81 4714.52,2313.81 4695.24,2294.53 ESP-Source.34
NetESP-Source_35: ESP-Source.35 S_TX_RX.4 | length 3125.7
  Top Layer w6: S_TX_RX.4 3160.98,3666.52 3319.47,3825 4680,3825 4725.95,3779.05 4725.95,2371.43 4718.34,2363.81 4714.52,2363.81 4695.24,2344.53 ESP-Source.35
NetLinear-Regulator_3: Linear-Regulator.3 SW-Battery-Charging.1 | length 993.9
  Top Layer w6: SW-Battery-Charging.1 2453.43,621.46 2474.05,600.83 2748.56,600.83 3004.95,344.45 Linear-Regulator.3
NetR-Rst_1: R-Rst.1 UART.9 | length 507.3
  Top Layer w6: UART.9 681.41,1733.67 681.41,1717.25 775.91,1622.75 1115.6,1622.75 1124.41,1613.94 R-Rst.1
NetS_TX_RX_2: S_TX_RX.2 UART.25 | length 3585.8
  Top Layer w6: v1(670,2275) 720,2225 UART.25 ; v1(1015,2305) 1015,2755 2030.85,3770.85 2706.26,3770.85 2909.02,3568.09 S_TX_RX.2
  Bottom Layer w6: 675,2300 680,2305 v1(1015,2305)
NetS_TX_RX_5: S_TX_RX.5 UART.24 | length 3626.2
  Top Layer w6: UART.24 739.68,2519.69 2006.85,3786.85 2712.88,3786.85 2869.84,3629.89 3069.65,3629.89 3131.46,3568.09 S_TX_RX.5
NetSW-5V/UART/BatChrg_2: SW-5V/UART/BatChrg.2 SW-5V/UART/BatChrg.5 USB-Micro.1 | length 1082.5
  Top Layer w6: USB-Micro.1 181.85,2211.18 370,2399.33 370,2745 453.43,2828.43 SW-5V/UART/BatChrg.2 SW-5V/UART/BatChrg.5
pads on no net: ESP-Sink.4 ESP-Sink.5 ESP-Sink.6 ESP-Sink.7 ESP-Sink.13 ESP-Sink.14 ESP-Sink.16 ESP-Sink.17 ESP-Sink.18 ESP-Sink.19 ESP-Sink.20 ESP-Sink.21 ESP-Sink.22 ESP-Sink.23 ESP-Sink.24 ESP-Sink.26 ESP-Sink.27 ESP-Sink.28 ESP-Sink.29 ESP-Sink.30 ESP-Sink.31 ESP-Sink.32 ESP-Sink.33 ESP-Sink.36 ESP-Sink.37 ESP-Sink.39_1 ESP-Sink.39_2 ESP-Sink.39_3 ESP-Sink.39_4 ESP-Sink.39_5 ESP-Sink.39_6 ESP-Sink.39_7 ESP-Sink.39_8 ESP-Sink.39_9 ESP-Sink.40 ESP-Sink.41 ESP-Sink.42 ESP-Sink.43 ESP-Sink.44 ESP-Sink.45 ESP-Sink.46 ESP-Sink.47 ESP-Sink.48 ESP-Sink.49 ESP-Sink.50 ESP-Sink.51 ESP-Source.4 ESP-Source.5 ESP-Source.6 ESP-Source.7 ESP-Source.8 ESP-Source.9 ESP-Source.13 ESP-Source.14 ESP-Source.16 ESP-Source.17 ESP-Source.18 ESP-Source.19 ESP-Source.20 ESP-Source.21 ESP-Source.22 ESP-Source.23 ESP-Source.24 ESP-Source.26 ESP-Source.27 ESP-Source.28 ESP-Source.29 ESP-Source.30 ESP-Source.31 ESP-Source.32 ESP-Source.33 ESP-Source.36 ESP-Source.37 ESP-Source.39_1 ESP-Source.39_2 ESP-Source.39_3 ESP-Source.39_4 ESP-Source.39_5 ESP-Source.39_6 ESP-Source.39_7 ESP-Source.39_8 ESP-Source.39_9 ESP-Source.40 ESP-Source.41 ESP-Source.42 ESP-Source.43 ESP-Source.44 ESP-Source.45 ESP-Source.46 ESP-Source.47 ESP-Source.48 ESP-Source.49 ESP-Source.50 ESP-Source.51 Linear-Regulator.4 SW-5V/UART/BatChrg.3 SW-5V/UART/BatChrg.6 SW-Battery-Charging.3 SW-Battery-Charging.4 SW-Battery-Charging.5 SW-Battery-Charging.6 SW-Boot-Sink.1 SW-Boot-Sink.2 SW-Boot-Sink.3 SW-Boot-Source.1 SW-Boot-Source.2 SW-Boot-Source.3 UART.1 UART.10 UART.11 UART.12 UART.13 UART.14 UART.15 UART.16 UART.17 UART.18 UART.19 UART.20 UART.21 UART.22 UART.23 UART.26 UART.27 UART.28 UART.29 USB-Micro.4 USB-Micro.6 USB-Micro.7 USB-Micro.8 USB-Micro.9 USB-Micro.10 USB-Micro.11

## Polygon pours and split planes (outlines as drawn)
GND on Top Layer "NONET_L01_P000" (solid, shelved, pour order 0): 15,3980 20,3985 4970,3985 4970,-960 4960,-970 4940,-950 55,-950 55,-840 0,-785 0,-960

## Silkscreen, mask and mechanical layers (free items; w line width, h text height)
Top Overlay:
  text "TEAM-13" at 340,3650 h60

## Text inside footprints (layer, text, board x,y; h text height)
Battery-Charge: Top Overlay "*" at 1115.25,422 h50; Mechanical 13 "*" at 1169,377.5 h50
USB-Micro: Mechanical 1 "PCB EDGE" at -4.17,2443.46 h11.81 r270